# Altium PCB CR-10 Motherboard.PcbDoc (part 2 of 14)
Units mil, origin at the board's own origin, x right, y up, seen from the top; angles counter-clockwise.
Board outline 3970.48 x 2769.68 mil, 2 copper layers (TopLayer, BottomLayer); 147 components, 128 nets, 667 pads, 614 vias.
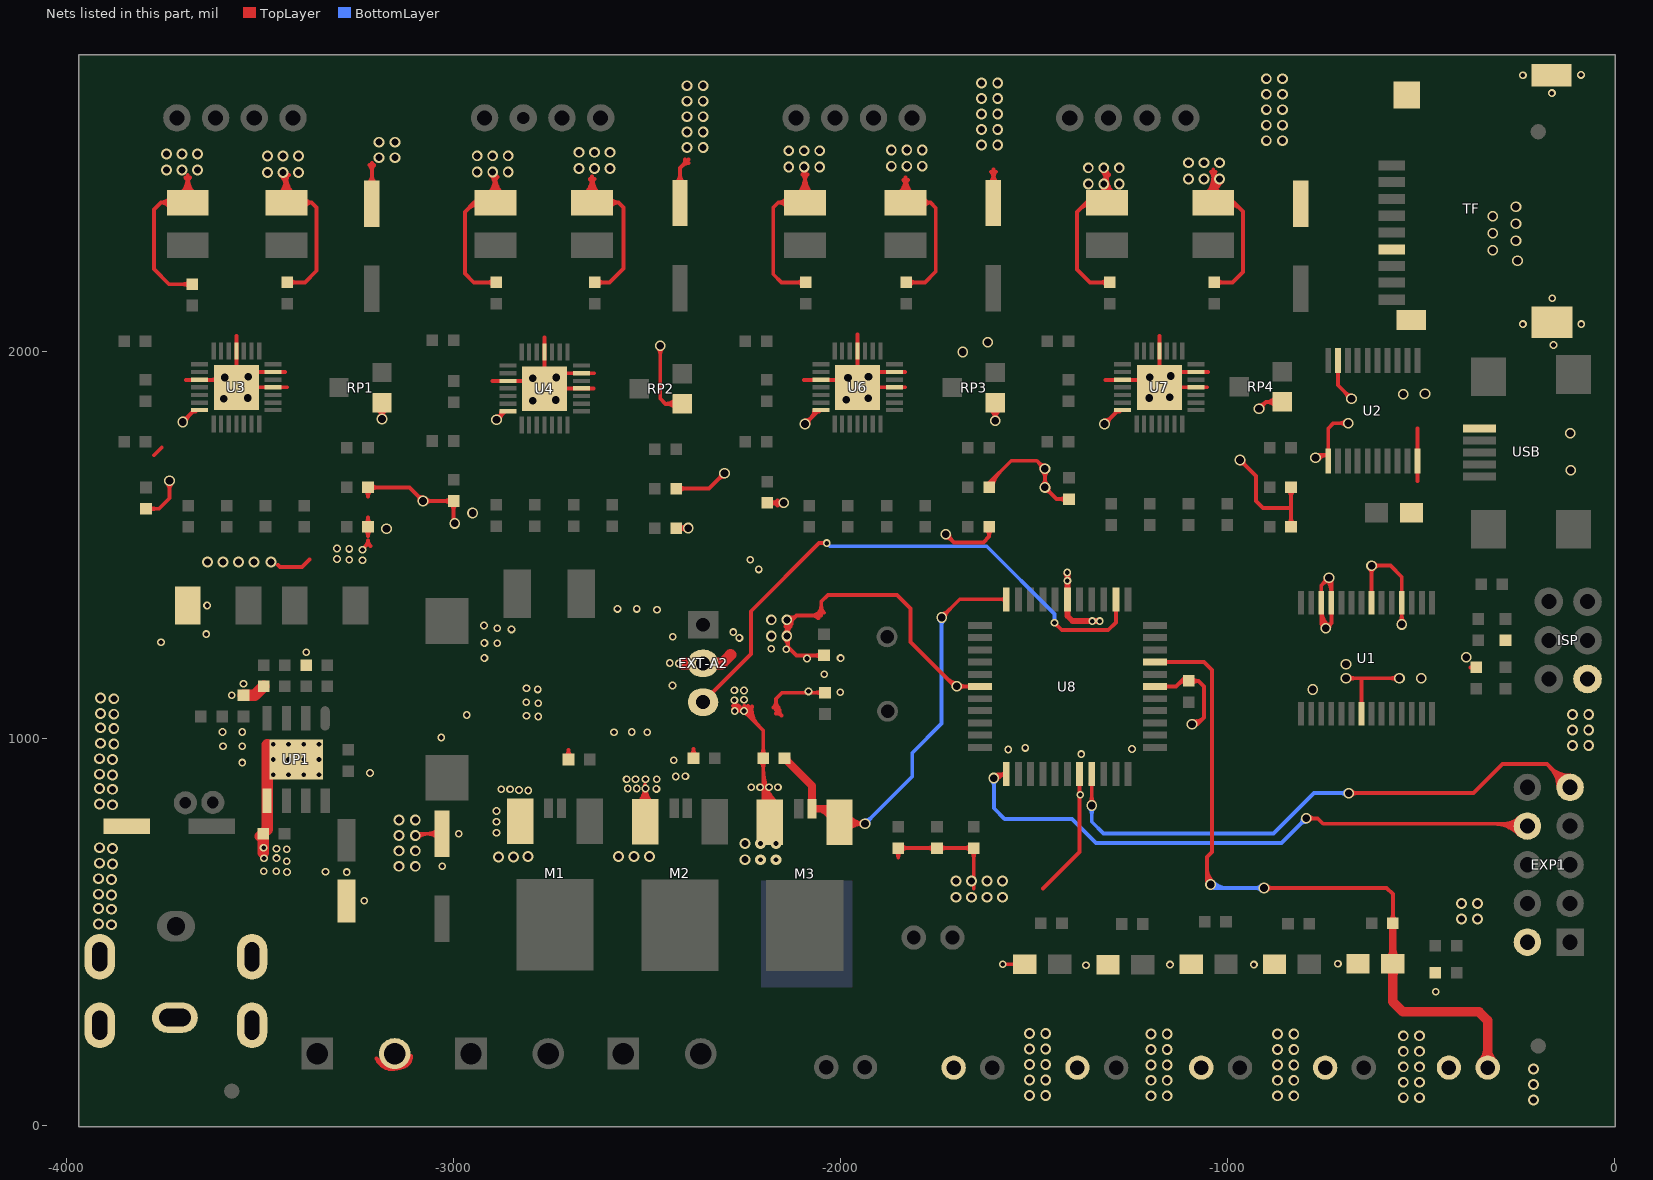
[diagram p2: the nets of this part, all layers, seen from the top]

## Via types
v1: diameter 28, hole 18, TopLayer to BottomLayer, tented both sides, 246 vias
v2: diameter 27.56, hole 19.68, TopLayer to BottomLayer, tented both sides, 196 vias
v3: diameter 20, hole 12, TopLayer to BottomLayer, tented both sides, 124 vias
v4: diameter 27.56, hole 11.81, TopLayer to BottomLayer, tented bottom, 16 vias
v5: diameter 27.56, hole 19.68, TopLayer to BottomLayer, 16 vias
v6: diameter 20, hole 12, TopLayer to BottomLayer, 12 vias
v7: diameter 28, hole 11.81, TopLayer to BottomLayer, tented both sides, 4 vias

## Nets (pads, with @x,y where several pads share a name; then routed paths per layer and width w, separated by ;. In a path a pad name is that pad's centre, name@x,y a point inside that pad or via, vN(x,y) a via of type N, cw(c..) or ccw(c..) an arc to the next point about the centre after c; other vN are vias at no path point) (continued)
Encoder_B: EXP1.8 U8.12 | length 2066
  TopLayer w10: v2@-1604.6,899.44 cw(c-1588.58,890.49) -1588.58,908.84 ; v2@-1604.58,899.48 cw(c-1587.86,889.24) -1587.86,908.84 ; v2(-1603.54,898.84) -1593.54,908.84 ; v2@-1596.05,894.26 cw(c-1570.01,878.31) U8.12@-1570.01,908.84 ; v2@-1595.87,894.56 cw(c-1571.54,880.97) U8.12@-1571.54,908.84 -1593.54,908.84 ; v2(-796.54,794.84) -766.54,794.84 -752.54,780.84 -230.77,780.84 EXP1.8@-224.77,774.84 ; v2@-790.33,788.63 cw(c-775.34,773.65) -775.34,794.84 cw(c-775.34,816.04) v2@-790.33,801.05 ; -312.73,780.84 cw(c-312.73,686.89) EXP1.8@-246.29,753.32 ; -288.59,780.84 cw(c-288.59,711.03) EXP1.8@-239.22,760.39 ; -283.76,780.84 ccw(c-283.76,833.83) EXP1.8@-246.29,796.36 ; -264.44,780.84 cw(c-264.44,735.17) EXP1.8@-232.15,767.47 ; -1593.54,908.84 cw(c-1598.49,913.79) -1600.73,907.16 ccw(c-1598.49,913.79) -1593.54,908.84 ; -1593.54,908.84 ccw(c-1588.59,903.89) -1595.22,901.65 cw(c-1588.59,903.89) -1593.54,908.84 ; -1581.19,908.84 cw(c-1581.19,899.19) -1574.36,906.01 ccw(c-1581.19,899.19) -1581.19,908.84 ; -1581.19,908.84 ccw(c-1581.19,918.5) -1574.36,911.67 cw(c-1581.19,918.5) -1581.19,908.84
  BottomLayer w10: v2(-1603.54,898.84) -1603.54,820.84 -1575.54,792.84 -1401.54,792.84 -1339.54,730.84 -860.54,730.84 v2(-796.54,794.84) ; v2@-805.31,794.84 cw(c-826.51,794.84) -811.52,779.85 cw(c-796.54,764.87) v2@-796.54,786.06 ; -1603.54,877.65 cw(c-1582.34,877.65) -1597.33,892.63 ccw(c-1582.34,877.65) -1603.54,877.65 ; -1603.54,877.65 ccw(c-1624.73,877.65) -1609.74,892.63 cw(c-1624.73,877.65) -1603.54,877.65
Encoder_Button: EXP1.9 U8.19 | length 1893.4
  TopLayer w10: v2(-1350.54,827.84) U8.19@-1350.54,908.84 ; v2(-686.54,859.84) -364.54,859.84 -289.54,934.84 -174.54,934.84 EXP1.9@-114.54,874.84 ; v2@-680.33,853.63 cw(c-665.34,838.65) -665.34,859.84 cw(c-665.34,881.04) v2@-680.33,866.05 ; EXP1.9@-144.97,874.84 ccw(c-218.44,874.84) -166.49,926.79 ccw(c-114.54,978.75) EXP1.9@-114.54,905.28 ; EXP1.9@-134.97,874.84 ccw(c-184.3,874.84) -149.42,909.72 ccw(c-114.54,944.61) EXP1.9@-114.54,895.28 ; -1350.54,849.04 cw(c-1371.73,849.04) -1356.74,834.05 ccw(c-1371.73,849.04) -1350.54,849.04 ; -1350.54,849.04 ccw(c-1329.34,849.04) -1344.33,834.05 cw(c-1329.34,849.04) -1350.54,849.04 ; -1350.54,877.19 cw(c-1340.88,877.19) -1347.71,884.01 ccw(c-1340.88,877.19) -1350.54,877.19 ; -1350.54,877.19 ccw(c-1360.19,877.19) -1353.36,884.01 cw(c-1360.19,877.19) -1350.54,877.19
  BottomLayer w10: v2(-1350.54,827.84) -1350.54,785.84 -1320.54,755.84 -880.54,755.84 -776.54,859.84 v2(-686.54,859.84) ; v2@-692.74,853.63 ccw(c-707.73,838.65) -707.73,859.84 ccw(c-707.73,881.04) v2@-692.74,866.05 ; -1350.54,806.65 cw(c-1329.34,806.65) -1344.33,821.63 ccw(c-1329.34,806.65) -1350.54,806.65 ; -1350.54,806.65 ccw(c-1371.73,806.65) -1356.74,821.63 cw(c-1371.73,806.65) -1350.54,806.65
ENDTEMP: C9.1 ETEMP.1 R5.1 U8.30 | length 4098.7
  TopLayer w10: U8.30@-1187.54,1198.84 -1060.54,1198.84 -1039.54,1177.84 -1039.54,707.84 -1052.54,694.84 -1052.54,632.84 v2(-1043.54,623.84) ; v2(-905.54,614.84) -588.54,614.84 -572.54,598.84 R5.1@-572.54,523.84 ; R5.1@-579.61,516.77 cw(c-596.68,499.7) -572.54,499.7 cw(c-548.39,499.7) R5.1@-565.46,516.77 ; -1155.88,1198.84 cw(c-1155.88,1208.5) -1162.71,1201.67 ccw(c-1155.88,1208.5) -1155.88,1198.84 ; -1155.88,1198.84 ccw(c-1155.88,1189.19) -1162.71,1196.01 cw(c-1155.88,1189.19) -1155.88,1198.84 ; -884.34,614.84 cw(c-884.34,636.04) -899.33,621.05 ccw(c-884.34,636.04) -884.34,614.84 ; -884.34,614.84 ccw(c-884.34,593.65) -899.33,608.63 cw(c-884.34,593.65) -884.34,614.84 ; R5.1@-579.61,530.91 ccw(c-596.68,547.98) -572.54,547.98 ; R5.1@-579.61,530.91 ccw(c-596.68,547.98) -572.54,547.98 ; R5.1@-579.61,530.91 ccw(c-596.68,547.98) -572.54,547.98 ; R5.1@-579.61,530.91 ccw(c-596.68,547.98) -572.54,547.98 ; R5.1@-579.61,530.91 ccw(c-596.68,547.98) -572.54,547.98 ; R5.1@-579.61,530.91 ccw(c-596.68,547.98) -572.54,547.98 ; R5.1@-579.61,530.91 ccw(c-596.68,547.98) -572.54,547.98 ; R5.1@-579.61,530.91 ccw(c-596.68,547.98) -572.54,547.98 ; R5.1@-579.61,530.91 ccw(c-596.68,547.98) -572.54,547.98 ; -572.54,547.98 ccw(c-548.39,547.98) R5.1@-565.46,530.91 ; -572.54,547.98 ccw(c-548.39,547.98) R5.1@-565.46,530.91 ; -572.54,547.98 ccw(c-548.39,547.98) R5.1@-565.46,530.91 ; -572.54,547.98 ccw(c-548.39,547.98) R5.1@-565.46,530.91 ; -572.54,547.98 ccw(c-548.39,547.98) R5.1@-565.46,530.91 ; -572.54,547.98 ccw(c-548.39,547.98) R5.1@-565.46,530.91 ; -572.54,547.98 ccw(c-548.39,547.98) R5.1@-565.46,530.91 ; -572.54,547.98 ccw(c-548.39,547.98) R5.1@-565.46,530.91 ; -572.54,547.98 ccw(c-548.39,547.98) R5.1@-565.46,530.91 ; ETEMP.1@-346.27,169.58 ccw(c-391.5,214.81) -327.54,214.81 ; ETEMP.1@-346.27,169.58 ccw(c-391.5,214.81) -327.54,214.81 ; ETEMP.1@-346.27,169.58 ccw(c-391.5,214.81) -327.54,214.81 ; ETEMP.1@-346.27,169.58 ccw(c-391.5,214.81) -327.54,214.81 ; ETEMP.1@-339.2,162.51 ccw(c-367.36,190.67) -327.54,190.67 ; ETEMP.1@-339.2,162.51 ccw(c-367.36,190.67) -327.54,190.67 ; ETEMP.1@-339.2,162.51 ccw(c-367.36,190.67) -327.54,190.67 ; ETEMP.1@-339.2,162.51 ccw(c-367.36,190.67) -327.54,190.67 ; -327.54,190.67 ccw(c-287.71,190.67) ETEMP.1@-315.87,162.51 ; -327.54,190.67 ccw(c-287.71,190.67) ETEMP.1@-315.87,162.51 ; -327.54,190.67 ccw(c-287.71,190.67) ETEMP.1@-315.87,162.51 ; -327.54,190.67 ccw(c-287.71,190.67) ETEMP.1@-315.87,162.51 ; -327.54,214.81 ccw(c-263.57,214.81) ETEMP.1@-308.8,169.58 ; -327.54,214.81 ccw(c-263.57,214.81) ETEMP.1@-308.8,169.58 ; -327.54,214.81 ccw(c-263.57,214.81) ETEMP.1@-308.8,169.58 ; -327.54,214.81 ccw(c-263.57,214.81) ETEMP.1@-308.8,169.58 ; -1052.54,642.62 ccw(c-1024.75,642.62) -1044.4,622.98 cw(c-1024.75,642.62) -1052.54,642.62 ; -1052.54,666.77 ccw(c-1000.61,666.77) -1037.33,630.05 cw(c-1000.61,666.77) -1052.54,666.77
  TopLayer w20: C9.1@-572.54,418.84 R5.1@-572.54,523.84 ; C9.1@-583.14,429.45 ccw(c-608.75,455.06) -572.54,455.06 ; C9.1@-583.14,429.45 ccw(c-608.75,455.06) -572.54,455.06 ; C9.1@-583.14,429.45 ccw(c-608.75,455.06) -572.54,455.06 ; C9.1@-583.14,429.45 ccw(c-608.75,455.06) -572.54,455.06 ; C9.1@-583.14,429.45 ccw(c-608.75,455.06) -572.54,455.06 ; C9.1@-583.14,429.45 ccw(c-608.75,455.06) -572.54,455.06 ; -572.54,455.06 ccw(c-536.32,455.06) C9.1@-561.93,429.45 ; -572.54,455.06 ccw(c-536.32,455.06) C9.1@-561.93,429.45 ; -572.54,455.06 ccw(c-536.32,455.06) C9.1@-561.93,429.45 ; -572.54,455.06 ccw(c-536.32,455.06) C9.1@-561.93,429.45 ; -572.54,455.06 ccw(c-536.32,455.06) C9.1@-561.93,429.45 ; -572.54,455.06 ccw(c-536.32,455.06) C9.1@-561.93,429.45
  TopLayer w25: -572.54,366.84 C9.1@-572.54,418.84 -572.54,320.84 -546.54,294.84 -453.54,294.84 -349.54,294.84 -327.54,272.84 ETEMP.1@-327.54,150.84 -327.54,250.84 ; C9.1@-581.37,410 cw(c-602.71,388.66) -572.54,388.66 ; C9.1@-581.37,410 cw(c-602.71,388.66) -572.54,388.66 ; C9.1@-581.37,410 cw(c-602.71,388.66) -572.54,388.66 ; -572.54,388.66 cw(c-542.36,388.66) C9.1@-563.7,410 ; -572.54,388.66 cw(c-542.36,388.66) C9.1@-563.7,410 ; -572.54,388.66 cw(c-542.36,388.66) C9.1@-563.7,410 ; -327.54,196.7 cw(c-373.4,196.7) -340.97,164.27 ccw(c-373.4,196.7) -327.54,196.7 ; -327.54,196.7 ccw(c-281.67,196.7) -314.1,164.27 cw(c-281.67,196.7) -327.54,196.7
  BottomLayer w10: v2@-1052.54,625.84 v2@-1047.04,620.34 ; v2(-1043.54,623.84) -1034.54,614.84 v2(-905.54,614.84) ; -926.73,614.84 cw(c-926.73,593.65) -911.74,608.63 ccw(c-926.73,593.65) -926.73,614.84 ; -926.73,614.84 ccw(c-926.73,636.04) -911.74,621.05 cw(c-926.73,636.04) -926.73,614.84 ; v2@-1044.4,622.98 ccw(c-1024.75,642.62) -1024.75,614.84 cw(c-1024.75,642.62) v2@-1044.4,622.98 ; v2@-1037.33,630.05 ccw(c-1000.61,666.77) -1000.61,614.84 cw(c-1000.61,666.77) v2@-1037.33,630.05
EXT-A2: EXT-A2.3 U8.35 | length 1477.3
  TopLayer w10: EXT-A2.3@-2355,1095 -2231,1219 -2231,1330 -2055,1506 v3(-2035,1506) ; v3(-1447,1300) -1428,1281 -1308,1281 -1288,1301 -1288,1360.38 U8.35@-1287.54,1360.84
  BottomLayer w10: v3(-2035,1506) -2027,1498 -1622,1498 -1447,1323 v3(-1447,1300)
FAN: JS3.1 M3.1 R12.1 U8.44 | length 5458.6
  TopLayer w10: M3.1@-1979.33,802.24 ccw(c-1936.54,834.34) v2(-1936.54,780.84) -1998.54,780.84 -2037.54,819.84 ; -1956.54,780.84 cw(c-1956.54,819.34) M3.1@-1987.34,796.24 ; v2(-1738.54,1313.84) -1691.54,1360.84 U8.44@-1571.54,1360.84 ; R12.1@-2144.54,939.84 cw(c-2144.54,915.7) -2127.46,932.77 ; R12.1@-2144.54,939.84 cw(c-2144.54,915.7) -2127.46,932.77 ; R12.1@-2144.54,939.84 cw(c-2144.54,915.7) -2127.46,932.77 ; R12.1@-2144.54,939.84 cw(c-2144.54,915.7) -2127.46,932.77 ; R12.1@-2144.54,939.84 cw(c-2144.54,915.7) -2127.46,932.77 ; R12.1@-2134.54,949.84 ccw(c-2110.39,949.84) -2127.46,932.77 ; R12.1@-2134.54,949.84 ccw(c-2110.39,949.84) -2127.46,932.77 ; R12.1@-2134.54,949.84 ccw(c-2110.39,949.84) -2127.46,932.77 ; R12.1@-2134.54,949.84 ccw(c-2110.39,949.84) -2127.46,932.77 ; R12.1@-2134.54,949.84 ccw(c-2110.39,949.84) -2127.46,932.77 ; JS3.1@-2078.49,837.79 ccw(c-2090.43,849.74) -2073.54,849.74 ; JS3.1@-2078.49,837.79 ccw(c-2090.43,849.74) -2073.54,849.74 ; JS3.1@-2078.49,837.79 ccw(c-2090.43,849.74) -2073.54,849.74 ; JS3.1@-2073.54,819.84 cw(c-2073.53,764.72) M3.1@-2027.01,794.29 ; JS3.1@-2073.54,819.84 cw(c-2073.53,764.72) M3.1@-2027.01,794.29 ; JS3.1@-2073.54,819.84 cw(c-2073.53,764.72) M3.1@-2027.01,794.29 ; JS3.1@-2073.54,819.84 cw(c-2073.53,764.72) M3.1@-2027.01,794.29 ; JS3.1@-2073.54,819.84 cw(c-2073.53,764.72) M3.1@-2027.01,794.29 ; JS3.1@-2073.54,819.84 cw(c-2073.53,764.72) M3.1@-2027.01,794.29 ; JS3.1@-2073.54,819.84 cw(c-2073.53,764.72) M3.1@-2027.01,794.29 ; JS3.1@-2073.54,819.84 cw(c-2073.53,764.72) M3.1@-2027.01,794.29 ; JS3.1@-2073.54,819.84 cw(c-2073.53,764.72) M3.1@-2027.01,794.29 ; -2073.54,849.74 ccw(c-2056.64,849.74) JS3.1@-2068.59,837.79 ; -2073.54,849.74 ccw(c-2056.64,849.74) JS3.1@-2068.59,837.79 ; -2073.54,849.74 ccw(c-2056.64,849.74) JS3.1@-2068.59,837.79 ; JS3.1@-2068.59,814.89 cw(c-2056.64,802.94) -2056.64,819.84 ; JS3.1@-2068.59,814.89 cw(c-2056.64,802.94) -2056.64,819.84 ; JS3.1@-2068.59,814.89 cw(c-2056.64,802.94) -2056.64,819.84 ; JS3.1@-2068.59,814.89 cw(c-2056.64,802.94) -2056.64,819.84 ; JS3.1@-2068.59,814.89 cw(c-2056.64,802.94) -2056.64,819.84 ; JS3.1@-2068.59,814.89 cw(c-2056.64,802.94) -2056.64,819.84 ; JS3.1@-2068.59,814.89 cw(c-2056.64,802.94) -2056.64,819.84 ; JS3.1@-2068.59,814.89 cw(c-2056.64,802.94) -2056.64,819.84 ; JS3.1@-2068.59,814.89 cw(c-2056.64,802.94) -2056.64,819.84 ; JS3.1@-2068.59,824.79 ccw(c-2056.64,836.74) -2056.64,819.84 ; JS3.1@-2068.59,824.79 ccw(c-2056.64,836.74) -2056.64,819.84 ; JS3.1@-2068.59,824.79 ccw(c-2056.64,836.74) -2056.64,819.84 ; JS3.1@-2068.59,824.79 ccw(c-2056.64,836.74) -2056.64,819.84 ; JS3.1@-2068.59,824.79 ccw(c-2056.64,836.74) -2056.64,819.84 ; JS3.1@-2068.59,824.79 ccw(c-2056.64,836.74) -2056.64,819.84 ; JS3.1@-2068.59,824.79 ccw(c-2056.64,836.74) -2056.64,819.84 ; JS3.1@-2068.59,824.79 ccw(c-2056.64,836.74) -2056.64,819.84 ; JS3.1@-2068.59,824.79 ccw(c-2056.64,836.74) -2056.64,819.84 ; -2055.33,819.84 cw(c-2055.33,776.29) M3.1@-2018.57,799.65 ; -2055.33,819.84 cw(c-2055.33,776.29) M3.1@-2018.57,799.65 ; -2055.33,819.84 cw(c-2055.33,776.29) M3.1@-2018.57,799.65 ; -2055.33,819.84 cw(c-2055.33,776.29) M3.1@-2018.57,799.65 ; -2055.33,819.84 cw(c-2055.33,776.29) M3.1@-2018.57,799.65 ; -2055.33,819.84 cw(c-2055.33,776.29) M3.1@-2018.57,799.65 ; -2055.33,819.84 cw(c-2055.33,776.29) M3.1@-2018.57,799.65 ; -2055.33,819.84 cw(c-2055.33,776.29) M3.1@-2018.57,799.65 ; -2055.33,819.84 cw(c-2055.33,776.29) M3.1@-2018.57,799.65 ; -2048.41,819.84 ccw(c-2048.41,855.71) M3.1@-2023.04,830.35 ; -2048.41,819.84 ccw(c-2048.41,855.71) M3.1@-2023.04,830.35 ; -2048.41,819.84 ccw(c-2048.41,855.71) M3.1@-2023.04,830.35 ; -2048.41,819.84 ccw(c-2048.41,855.71) M3.1@-2023.04,830.35 ; -2048.41,819.84 ccw(c-2048.41,855.71) M3.1@-2023.04,830.35 ; -2048.41,819.84 ccw(c-2048.41,855.71) M3.1@-2023.04,830.35 ; -2048.41,819.84 ccw(c-2048.41,855.71) M3.1@-2023.04,830.35 ; -2048.41,819.84 ccw(c-2048.41,855.71) M3.1@-2023.04,830.35 ; -2048.41,819.84 ccw(c-2048.41,855.71) M3.1@-2023.04,830.35 ; -2037.53,819.84 ccw(c-2037.53,832.58) M3.1@-2026.85,825.64 ; -2037.53,819.84 ccw(c-2037.53,832.58) M3.1@-2026.85,825.64 ; -2037.53,819.84 ccw(c-2037.53,832.58) M3.1@-2026.85,825.64 ; -2037.53,819.84 ccw(c-2037.53,832.58) M3.1@-2026.85,825.64 ; -2037.53,819.84 ccw(c-2037.53,832.58) M3.1@-2026.85,825.64 ; -2037.53,819.84 ccw(c-2037.53,832.58) M3.1@-2026.85,825.64 ; -2037.53,819.84 ccw(c-2037.53,832.58) M3.1@-2026.85,825.64 ; -2037.53,819.84 ccw(c-2037.53,832.58) M3.1@-2026.85,825.64 ; -2037.53,819.84 ccw(c-2037.53,832.58) M3.1@-2026.85,825.64 ; -2037.12,819.84 cw(c-2037.12,787.86) M3.1@-2010.13,805.02 ; -2037.12,819.84 cw(c-2037.12,787.86) M3.1@-2010.13,805.02 ; -2037.12,819.84 cw(c-2037.12,787.86) M3.1@-2010.13,805.02 ; -2037.12,819.84 cw(c-2037.12,787.86) M3.1@-2010.13,805.02 ; -2037.12,819.84 cw(c-2037.12,787.86) M3.1@-2010.13,805.02 ; -2037.12,819.84 cw(c-2037.12,787.86) M3.1@-2010.13,805.02 ; -2037.12,819.84 cw(c-2037.12,787.86) M3.1@-2010.13,805.02 ; -2037.12,819.84 cw(c-2037.12,787.86) M3.1@-2010.13,805.02 ; -2037.12,819.84 cw(c-2037.12,787.86) M3.1@-2010.13,805.02 ; M3.1@-1989.1,771.41 cw(c-1966.32,748.63) -1966.32,780.84 ; M3.1@-1989.1,771.41 cw(c-1966.32,748.63) -1966.32,780.84 ; M3.1@-1989.1,771.41 cw(c-1966.32,748.63) -1966.32,780.84 ; M3.1@-1989.1,771.41 cw(c-1966.32,748.63) -1966.32,780.84 ; M3.1@-1989.1,771.41 cw(c-1966.32,748.63) -1966.32,780.84 ; M3.1@-1989.1,771.41 cw(c-1966.32,748.63) -1966.32,780.84 ; M3.1@-1989.1,771.41 cw(c-1966.32,748.63) -1966.32,780.84 ; M3.1@-1987.35,796.26 ccw(c-1956.45,819.51) -1956.45,780.84 ; M3.1@-1987.35,796.26 ccw(c-1956.45,819.51) -1956.45,780.84 ; M3.1@-1987.35,796.26 ccw(c-1956.45,819.51) -1956.45,780.84 ; M3.1@-1987.35,796.26 ccw(c-1956.45,819.51) -1956.45,780.84 ; M3.1@-1987.35,796.26 ccw(c-1956.45,819.51) -1956.45,780.84 ; M3.1@-1987.35,796.26 ccw(c-1956.45,819.51) -1956.45,780.84 ; M3.1@-1982.03,764.34 cw(c-1942.18,724.49) v2@-1942.18,780.84 ; M3.1@-1982.03,764.34 cw(c-1942.18,724.49) v2@-1942.18,780.84 ; M3.1@-1982.03,764.34 cw(c-1942.18,724.49) v2@-1942.18,780.84 ; M3.1@-1982.03,764.34 cw(c-1942.18,724.49) v2@-1942.18,780.84 ; M3.1@-1982.03,764.34 cw(c-1942.18,724.49) v2@-1942.18,780.84 ; M3.1@-1982.03,764.34 cw(c-1942.18,724.49) v2@-1942.18,780.84 ; M3.1@-1982.03,764.34 cw(c-1942.18,724.49) v2@-1942.18,780.84 ; M3.1@-1979.36,802.28 ccw(c-1936.42,834.58) v2@-1936.42,780.84 ; M3.1@-1979.36,802.28 ccw(c-1936.42,834.58) v2@-1936.42,780.84 ; M3.1@-1979.36,802.28 ccw(c-1936.42,834.58) v2@-1936.42,780.84 ; M3.1@-1979.36,802.28 ccw(c-1936.42,834.58) v2@-1936.42,780.84 ; M3.1@-1979.36,802.28 ccw(c-1936.42,834.58) v2@-1936.42,780.84 ; M3.1@-1979.36,802.28 ccw(c-1936.42,834.58) v2@-1936.42,780.84 ; -1957.73,780.84 cw(c-1957.73,759.65) v2@-1942.74,774.63 ; -1957.73,780.84 ccw(c-1957.73,802.04) v2@-1942.74,787.05 ; -1957.73,780.84 cw(c-1957.73,759.65) v2@-1942.74,774.63 ; -1957.73,780.84 ccw(c-1957.73,802.04) v2@-1942.74,787.05 ; -1957.73,780.84 cw(c-1957.73,759.65) v2@-1942.74,774.63 ; -1957.73,780.84 ccw(c-1957.73,802.04) v2@-1942.74,787.05 ; -1957.73,780.84 cw(c-1957.73,759.65) v2@-1942.74,774.63 ; -1957.73,780.84 ccw(c-1957.73,802.04) v2@-1942.74,787.05 ; -1957.73,780.84 ccw(c-1957.73,802.04) v2@-1942.74,787.05 ; -1957.73,780.84 cw(c-1957.73,759.65) v2@-1942.74,774.63 ; -1957.73,780.84 ccw(c-1957.73,802.04) v2@-1942.74,787.05 ; -1957.73,780.84 cw(c-1957.73,759.65) v2@-1942.74,774.63 ; -1957.73,780.84 ccw(c-1957.73,802.04) v2@-1942.74,787.05 ; -1957.73,780.84 cw(c-1957.73,759.65) v2@-1942.74,774.63 ; v2@-1738.54,1322.62 ccw(c-1738.54,1343.82) -1723.55,1328.83 ; v2@-1738.54,1322.62 ccw(c-1738.54,1343.82) -1723.55,1328.83 ; v2@-1738.54,1322.62 ccw(c-1738.54,1343.82) -1723.55,1328.83 ; v2@-1738.54,1322.62 ccw(c-1738.54,1343.82) -1723.55,1328.83 ; v2@-1738.54,1322.62 ccw(c-1738.54,1343.82) -1723.55,1328.83 ; v2@-1738.54,1322.62 ccw(c-1738.54,1343.82) -1723.55,1328.83 ; v2@-1738.54,1322.62 ccw(c-1738.54,1343.82) -1723.55,1328.83 ; v2@-1738.54,1322.62 ccw(c-1738.54,1343.82) -1723.55,1328.83 ; v2@-1738.54,1322.62 ccw(c-1738.54,1343.82) -1723.55,1328.83 ; v2@-1729.76,1313.84 cw(c-1708.56,1313.84) -1723.55,1328.83 ; v2@-1729.76,1313.84 cw(c-1708.56,1313.84) -1723.55,1328.83 ; v2@-1729.76,1313.84 cw(c-1708.56,1313.84) -1723.55,1328.83 ; v2@-1729.76,1313.84 cw(c-1708.56,1313.84) -1723.55,1328.83 ; v2@-1729.76,1313.84 cw(c-1708.56,1313.84) -1723.55,1328.83 ; v2@-1729.76,1313.84 cw(c-1708.56,1313.84) -1723.55,1328.83 ; v2@-1729.76,1313.84 cw(c-1708.56,1313.84) -1723.55,1328.83 ; v2@-1729.76,1313.84 cw(c-1708.56,1313.84) -1723.55,1328.83 ; v2@-1729.76,1313.84 cw(c-1708.56,1313.84) -1723.55,1328.83 ; -1581.19,1360.84 cw(c-1581.19,1351.19) U8.44@-1574.36,1358.01 ; -1581.19,1360.84 ccw(c-1581.19,1370.5) U8.44@-1574.36,1363.67 ; -1581.19,1360.84 cw(c-1581.19,1351.19) U8.44@-1574.36,1358.01 ; -1581.19,1360.84 ccw(c-1581.19,1370.5) U8.44@-1574.36,1363.67 ; -1581.19,1360.84 cw(c-1581.19,1351.19) U8.44@-1574.36,1358.01 ; -1581.19,1360.84 ccw(c-1581.19,1370.5) U8.44@-1574.36,1363.67 ; -1581.19,1360.84 cw(c-1581.19,1351.19) U8.44@-1574.36,1358.01 ; -1581.19,1360.84 ccw(c-1581.19,1370.5) U8.44@-1574.36,1363.67 ; -1581.19,1360.84 cw(c-1581.19,1351.19) U8.44@-1574.36,1358.01 ; -1581.19,1360.84 ccw(c-1581.19,1370.5) U8.44@-1574.36,1363.67 ; -1581.19,1360.84 ccw(c-1581.19,1370.5) U8.44@-1574.36,1363.67 ; -1581.19,1360.84 cw(c-1581.19,1351.19) U8.44@-1574.36,1358.01 ; -1581.19,1360.84 ccw(c-1581.19,1370.5) U8.44@-1574.36,1363.67 ; -1581.19,1360.84 cw(c-1581.19,1351.19) U8.44@-1574.36,1358.01 ; -1581.19,1360.84 ccw(c-1581.19,1370.5) U8.44@-1574.36,1363.67 ; -1581.19,1360.84 cw(c-1581.19,1351.19) U8.44@-1574.36,1358.01 ; -1581.19,1360.84 ccw(c-1581.19,1370.5) U8.44@-1574.36,1363.67 ; -1581.19,1360.84 cw(c-1581.19,1351.19) U8.44@-1574.36,1358.01
  TopLayer w20: R12.1@-2144.54,949.84 -2073.54,878.84 JS3.1@-2073.54,819.84 -2037.54,819.84
  BottomLayer w10: v2(-1936.54,780.84) -1814.54,902.84 -1814.54,963.84 -1738.54,1039.84 v2(-1738.54,1313.84) ; v2@-1936.54,789.62 ccw(c-1936.54,810.82) -1921.55,795.83 ; v2@-1936.54,789.62 ccw(c-1936.54,810.82) -1921.55,795.83 ; v2@-1936.54,789.62 ccw(c-1936.54,810.82) -1921.55,795.83 ; v2@-1936.54,789.62 ccw(c-1936.54,810.82) -1921.55,795.83 ; v2@-1936.54,789.62 ccw(c-1936.54,810.82) -1921.55,795.83 ; v2@-1936.54,789.62 ccw(c-1936.54,810.82) -1921.55,795.83 ; v2@-1936.54,789.62 ccw(c-1936.54,810.82) -1921.55,795.83 ; v2@-1927.76,780.84 cw(c-1906.56,780.84) -1921.55,795.83 ; v2@-1927.76,780.84 cw(c-1906.56,780.84) -1921.55,795.83 ; v2@-1927.76,780.84 cw(c-1906.56,780.84) -1921.55,795.83 ; v2@-1927.76,780.84 cw(c-1906.56,780.84) -1921.55,795.83 ; v2@-1927.76,780.84 cw(c-1906.56,780.84) -1921.55,795.83 ; v2@-1927.76,780.84 cw(c-1906.56,780.84) -1921.55,795.83 ; v2@-1927.76,780.84 cw(c-1906.56,780.84) -1921.55,795.83 ; v2@-1744.74,1307.63 cw(c-1759.73,1292.65) -1738.54,1292.65 ; v2@-1744.74,1307.63 cw(c-1759.73,1292.65) -1738.54,1292.65 ; v2@-1744.74,1307.63 cw(c-1759.73,1292.65) -1738.54,1292.65 ; v2@-1744.74,1307.63 cw(c-1759.73,1292.65) -1738.54,1292.65 ; v2@-1744.74,1307.63 cw(c-1759.73,1292.65) -1738.54,1292.65 ; v2@-1744.74,1307.63 cw(c-1759.73,1292.65) -1738.54,1292.65 ; v2@-1744.74,1307.63 cw(c-1759.73,1292.65) -1738.54,1292.65 ; v2@-1744.74,1307.63 cw(c-1759.73,1292.65) -1738.54,1292.65 ; v2@-1744.74,1307.63 cw(c-1759.73,1292.65) -1738.54,1292.65 ; -1738.54,1292.65 cw(c-1717.34,1292.65) v2@-1732.33,1307.63 ; -1738.54,1292.65 cw(c-1717.34,1292.65) v2@-1732.33,1307.63 ; -1738.54,1292.65 cw(c-1717.34,1292.65) v2@-1732.33,1307.63 ; -1738.54,1292.65 cw(c-1717.34,1292.65) v2@-1732.33,1307.63 ; -1738.54,1292.65 cw(c-1717.34,1292.65) v2@-1732.33,1307.63 ; -1738.54,1292.65 cw(c-1717.34,1292.65) v2@-1732.33,1307.63 ; -1738.54,1292.65 cw(c-1717.34,1292.65) v2@-1732.33,1307.63 ; -1738.54,1292.65 cw(c-1717.34,1292.65) v2@-1732.33,1307.63 ; -1738.54,1292.65 cw(c-1717.34,1292.65) v2@-1732.33,1307.63
GND: 1K.2 B-MOT.2 C1.2 C2.2 C3.2 C4.2 C5.2 C6.2 C7.2 C8.2 C9.2 C11.1 C12.2 C13.2 C15.1 C16.2 C17.2 C19.1 C20.2 C21.2 C23.1 C24.2 C25.2 C28.2 C30.2 C31.2 C34.2 C36.2 C38.2 C40.2 C41.2 C42.2 C43.2 C44.2 C45.2 C50.2 C51.2 CP2.2 DP1.1 ETEMP.2 EXP1.2 EXT-A2.2 ISP.6 M1.3 M2.3 M3.3 pad.0 PWR.1 R10.2 R11.2 R12.2 R14.2 R17.2 R20.2 R23.2 R25.2 R_P2.2 R_P3.2 R_P5.2 R_P6.2 RP1.2 RP2.2 RP3.2 RP4.2 S1.2 S2.2 S3.2 S4.2 S5.2 S6.2 S7.2 S8.2 TF.0 TF.6 U1.7 U1.18 U1.21 U1.25 U1.26 U2.1 U2.10 U2.19 U3.0 U3.3 U3.7 U3.18 U3.20 U3.25 U4.0 U4.3 U4.7 U4.18 U4.20 U4.25 U6.0 U6.3 U6.7 U6.18 U6.20 U6.25 U7.0 U7.3 U7.7 U7.18 U7.20 U7.25 U8.6 U8.18 U8.28 U8.39 UP1.0 UP1.5 USB.1 X-STOP.2 Y-STOP.2 Z-STOP.2 | length 62071